# Altium PCB project_10.PcbDoc
Units mil, origin at the board's own origin, x right, y up, seen from the top; angles counter-clockwise.
Board outline 2470 x 2740 mil, 2 copper layers (Top Layer, Bottom Layer); 16 components, 42 nets, 110 pads, 10 vias.
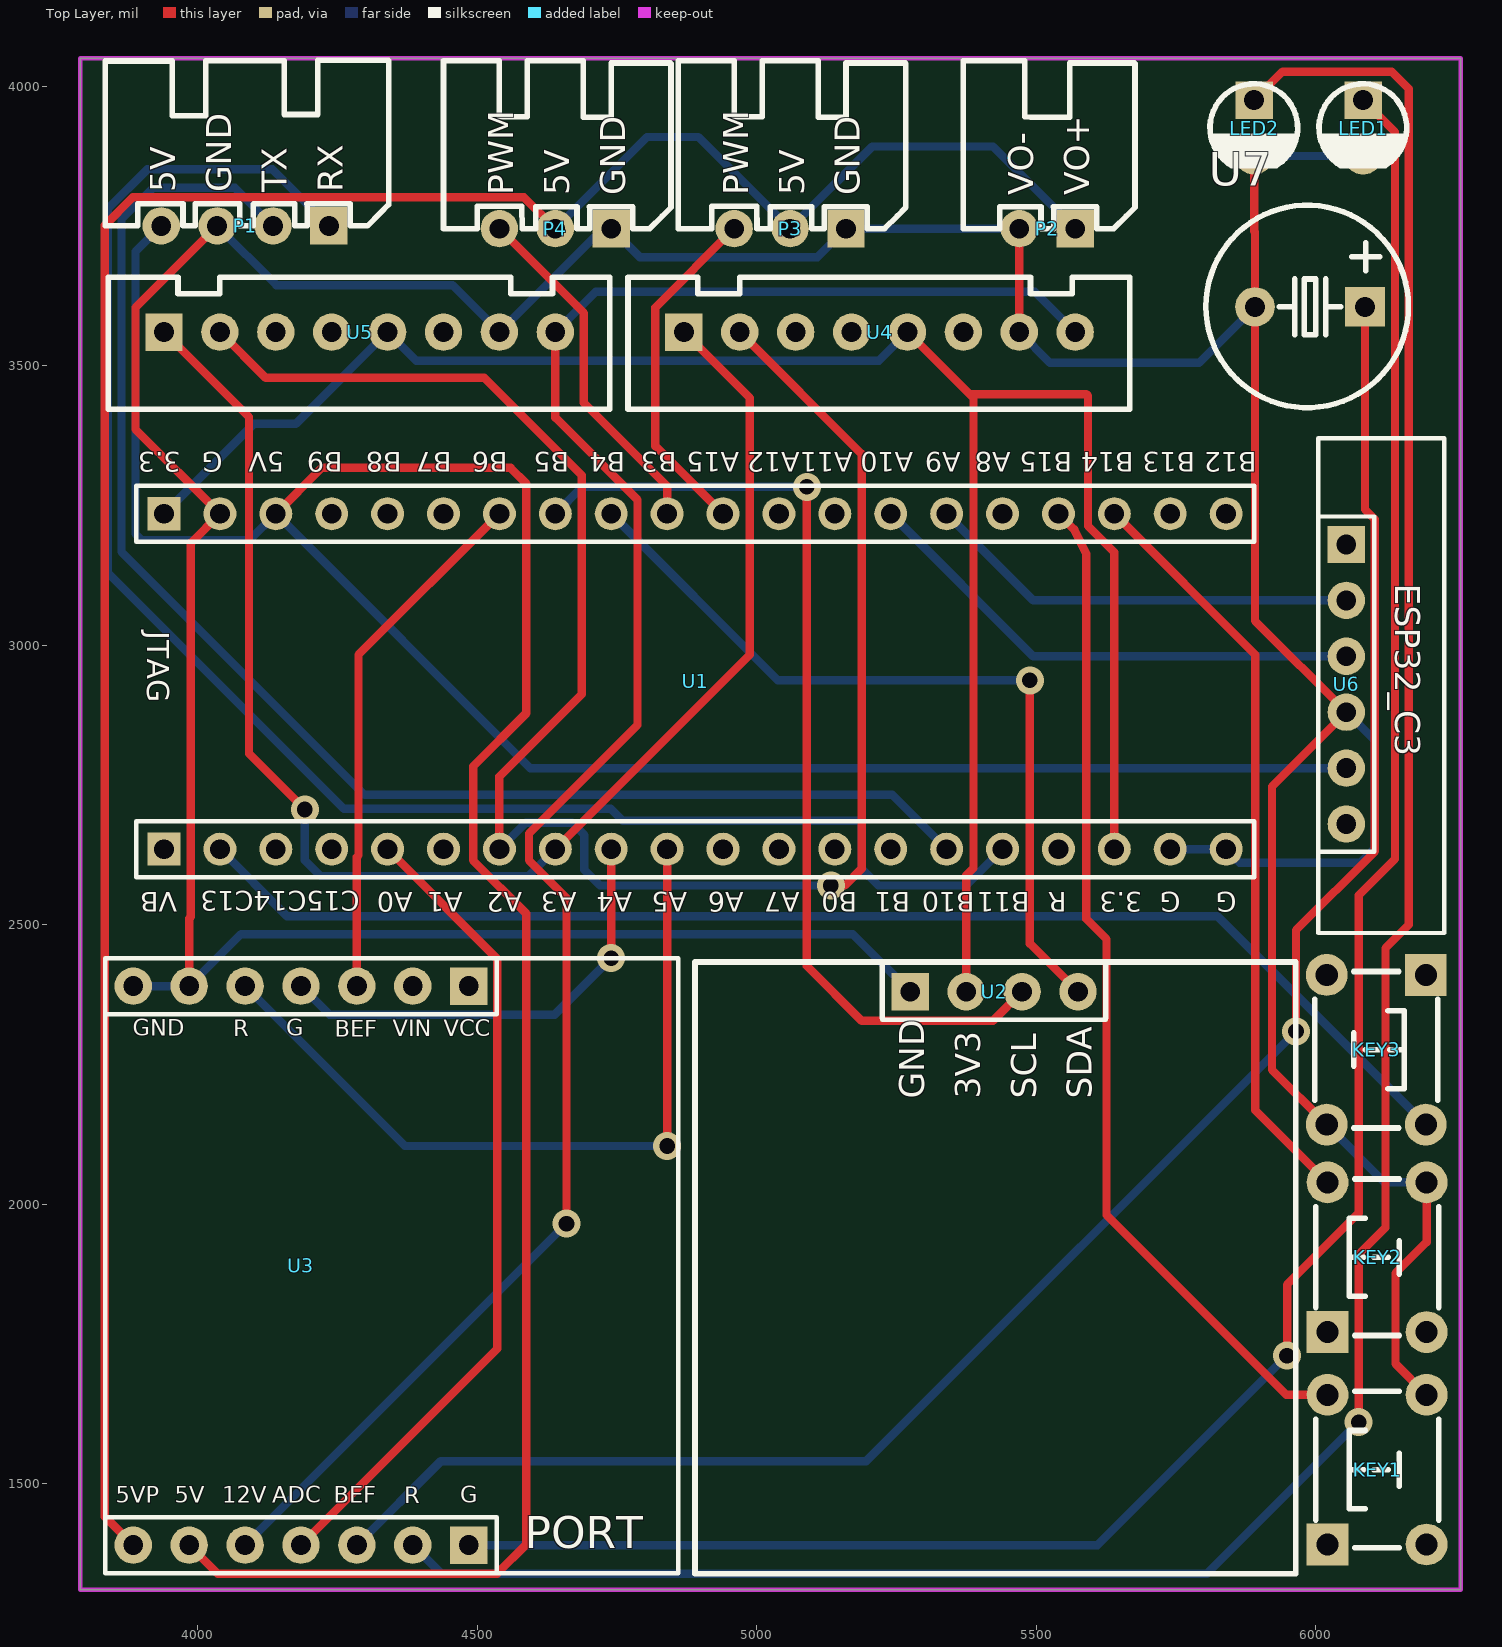
[diagram p0: Top Layer view]
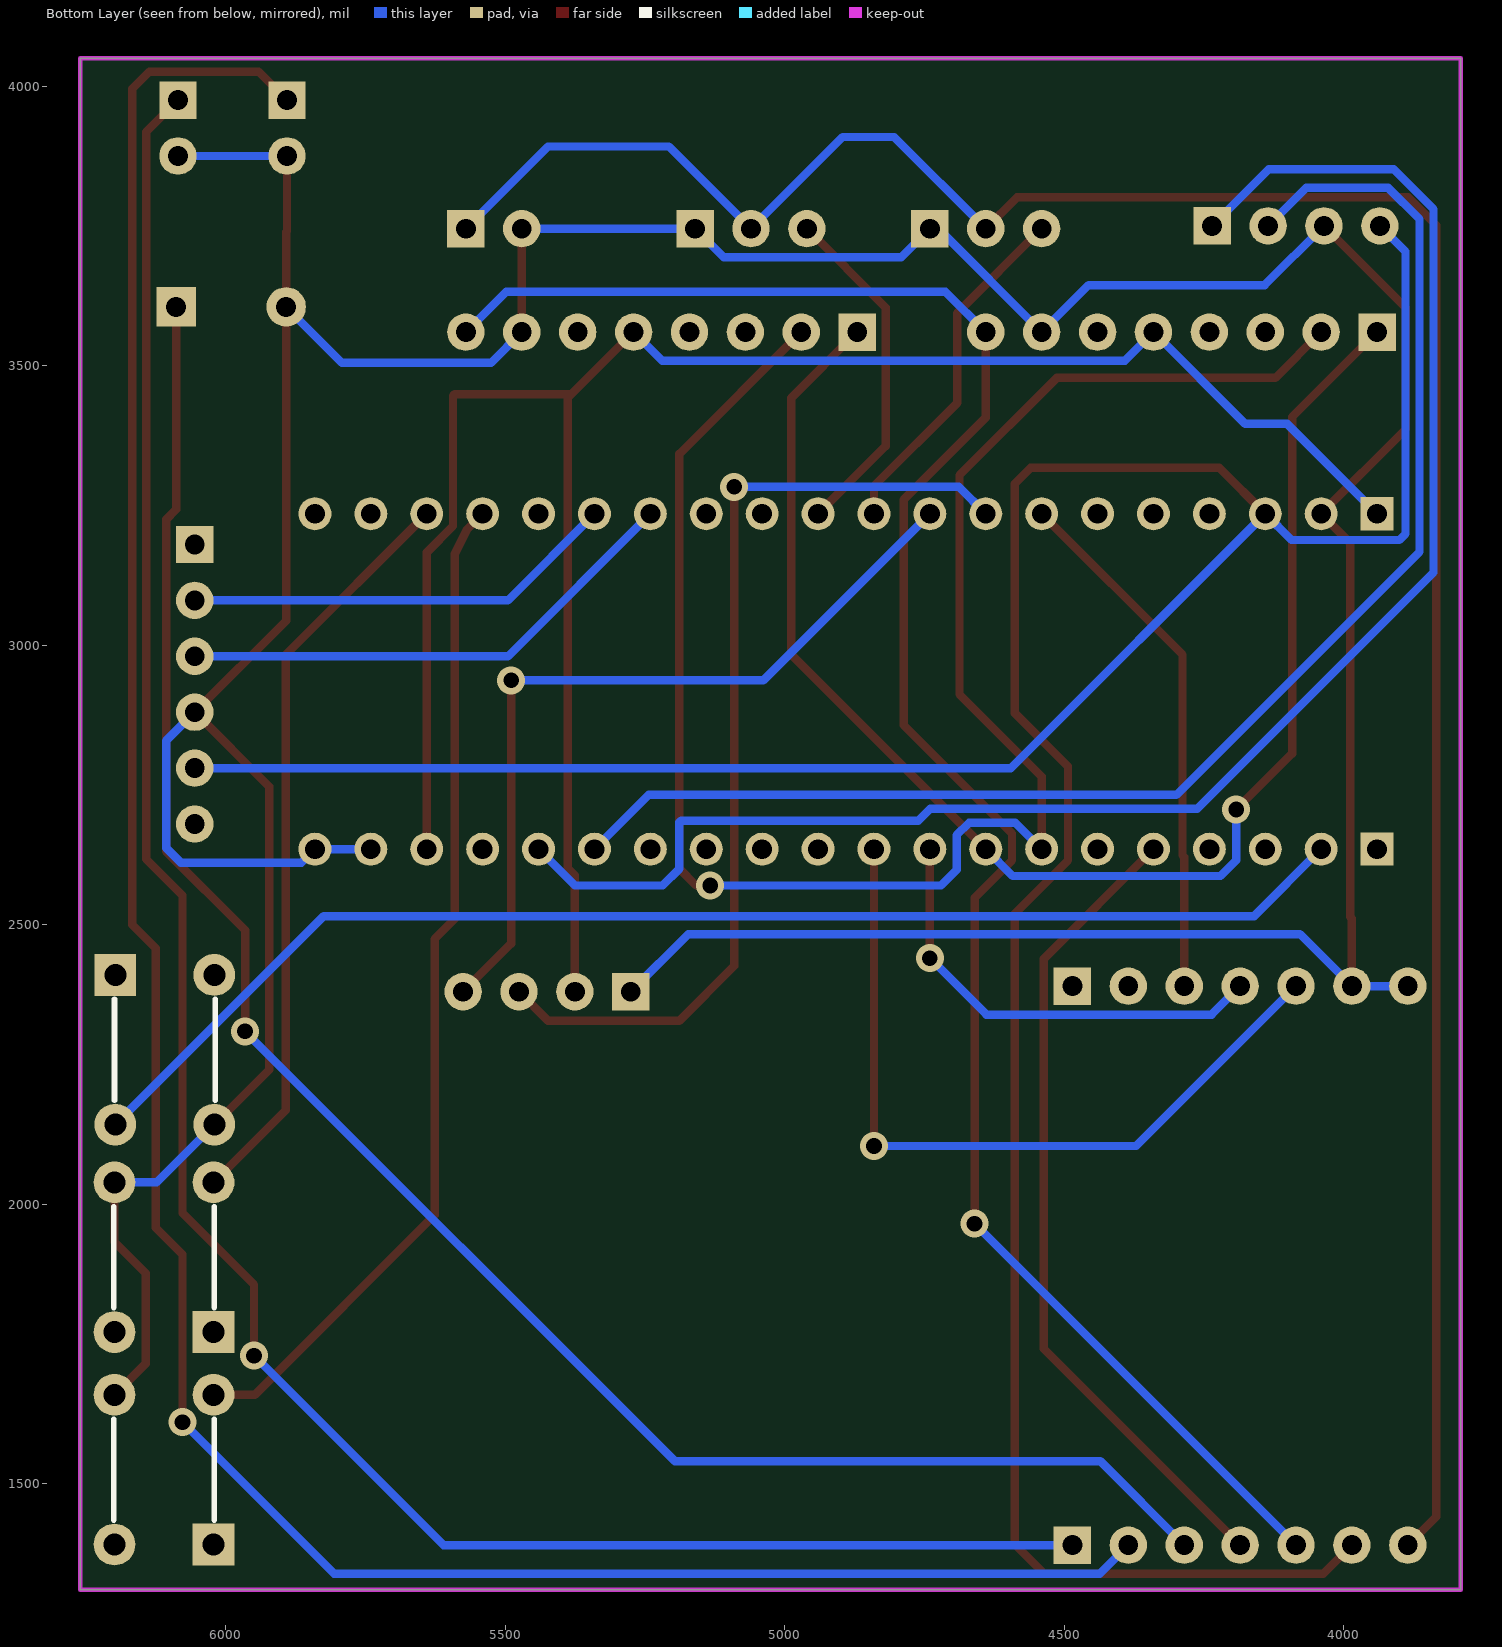
[diagram p1: Bottom Layer view, seen from below]

## Layer stack, top to bottom
Top Solder: solder mask 0.4, Solder Resist, Dk 3.5
Top Layer: signal copper 1.4
Dielectric 1: dielectric 12.6, FR-4, Dk 4.8
Bottom Layer: signal copper 1.4
Bottom Solder: solder mask 0.4, Solder Resist, Dk 3.5

## Board outline
3790,1310 6260,1310 6260,4050 3790,4050

## Design rules (kind name [scope] priority, off if disabled: settings)
Clearance [All] p1: gap=10 ignorepadtopadclearanceinfootprint=FALSE
PolygonConnect [All] p1: connectstyle=Relief reliefconductorwidth=10 reliefentries=4 polygonreliefangle="90 Angle" airgapwidth=10
RoutingVias [All] p1: holewidth=28 width=50 viastyle="Through Hole" minholewidth=28 minwidth=50 maxholewidth=28 maxwidth=50
SolderMaskExpansion [All] p1: expansion=4 istentingtop=FALSE
SupplyNets "Schematic Supply Nets_4" [InNet('12V')] p1: voltage=0.000
SupplyNets "Schematic Supply Nets_3" [InNet('5V_POW')] p2: voltage=0.000
SupplyNets "Schematic Supply Nets_2" [InNet('3V3')] p3: voltage=0.000
SupplyNets "Schematic Supply Nets_1" [InNet('5V')] p4: voltage=0.000
SupplyNets "Schematic Supply Nets" [InNet('GND')] p5: voltage=0.000
Width [All] p1: maxlimit=100 minlimit=10 preferedwidth=15 minimp=50.000000 maximp=50.000000 favimp=50.000000
30 further rules are at their usual default settings.

## Components (designator, comment, footprint, x,y, rotation, side; value= is the part's Value field where it differs from the comment)
KEY1 "mod_buttom" MOD_BUTTOM 6110,1515 r90 top
KEY2 "mod_buttom" MOD_BUTTOM 6110,1895 r90 top
KEY3 "mod_buttom" MOD_BUTTOM 6108.58,2286.14 r270 top
LED1 "红色" "LED 3MM-B" 6085,3925 r270 top
LED2 "红色" "LED 3MM-B" 5890,3925 r270 top
P1 "port_uart_4p" XH2.54_4P 4090,3905 r0 top
P2 "port_mot_2p" XH2.54_2P 5515,3870 r0 top
P3 "port_pwm_3p" XH2.54_3P 5075,3880 r0 top
P4 "port_pwm_3p" XH2.54_3P 4655,3880 r0 top
U1 "f1_hw_2_gw" F1_HW_2_GW 4880,2925 r180 top
U2 "mod_oled" MOD_OLED 5429.91,2378.15 r0 top
U3 "pow_hw_3_V02.00" POW_HW_3_2 4305,1925 r0 top
U4 "mod_ZDTMotor" XH2.54-LI-8P 5220,3560 r0 top
U5 "mod_ZDTMotor" XH2.54-LI-8P 4290,3560 r0 top
U6 "c3_hw_1" C3_HW_1 6055,2930 r270 top
U7 "mod_buzzer" MOD_BUZZER 5985,3610 r0 top

## Footprints (in the part's own frame and the unit in brackets; to place one, negate y for a bottom-side part, rotate by r counter-clockwise, add the part's x,y. Pads: shape width x height; smd on the part's side, far side on the other; paste and mask are expansions set on the pad)
C3_HW_1 [mm]
  rect 1.7x1.7 hole 0.9: 1(-6.35,0)
  round 1.7 hole 0.9: 2(-3.81,0) 3(-1.27,0) 4(1.27,0) 5(3.81,0) 6(6.35,0)
  silkscreen extent -11.18,-1.27 11.3,4.45, body extent -11.18,-1.27 11.3,4.45, height 8.5
F1_HW_2_GW [mm]
  rect 1.5x1.5 hole 0.9: 1(23.876,7.366) 21(23.876,-7.874)
  round 1.5 hole 0.9: 2(21.336,7.366) 3(18.796,7.366) 4(16.256,7.366) 5(13.716,7.366) 6(11.176,7.366) 7(8.636,7.366) 8(6.096,7.366) 9(3.556,7.366) 10(1.016,7.366) 11(-1.524,7.366) 12(-4.064,7.366) 13(-6.604,7.366) 14(-9.144,7.366) 15(-11.684,7.366) 16(-14.224,7.366) 17(-16.764,7.366) 18(-19.304,7.366) 19(-21.844,7.366) 20(-24.384,7.366) 22(21.336,-7.874) 23(18.796,-7.874) 24(16.256,-7.874) 25(13.716,-7.874) 26(11.176,-7.874) 27(8.636,-7.874) 28(6.096,-7.874) 29(3.556,-7.874) 30(1.016,-7.874) 31(-1.524,-7.874) 32(-4.064,-7.874) 33(-6.604,-7.874) 34(-9.144,-7.874) 35(-11.684,-7.874) 36(-14.224,-7.874) 37(-16.764,-7.874) 38(-19.304,-7.874) 39(-21.844,-7.874) 40(-24.384,-7.874)
  silkscreen extent -25.65,-9.14 25.15,8.64, body extent -26.92,-11.56 26.42,11.18, height 0.25
"LED 3MM-B" [mm] "蓝色3mm直插LED"
  rect 1.7x1.7 hole 0.9: 1(-1.27,0)
  round 1.7 hole 0.9: 2(1.27,0)
  silkscreen extent -2.01,-2 1.72,1.98, body extent -1.95,-1.95 1.64,1.95, height 5.55
MOD_BUTTOM [mm]
  rect 1.9x1.9 hole 1: 1(-3.146,2.25)
  round 1.9 hole 1: 2(-3.146,-2.25) 3(3.654,-2.25) 4(3.654,2.25)
  silkscreen extent -3.3,-2.79 3.81,2.79, body extent -3.85,-3 4.36,3, height 4.25
MOD_BUZZER [mm] "有源蜂鸣器"
  rect 1.8x1.8 hole 0.9: 1(2.627,-0.127)
  round 1.8 hole 0.9: 2(-2.373,-0.127)
  silkscreen extent -4.6,-4.7 4.6,4.49, body extent -4.37,-4.63 4.63,4.37, height 5.45
MOD_OLED [mm] "外购屏幕模块接口"
  rect 1.7x1.7 hole 0.9: 1(-3.935,0.047)
  round 1.7 hole 0.9: 2(-1.395,0.047) 3(1.145,0.047) 4(3.685,0.047)
  silkscreen extent -13.72,-26.4 13.58,1.4, body extent -13.72,-26.42 13.59,1.4, height 8.5
POW_HW_3_2 [mm]
  rect 1.7x1.7 hole 0.9: 1(4.572,11.811) 7(4.572,-13.589)
  round 1.7 hole 0.9: 2(2.032,11.811) 3(-0.508,11.811) 4(-3.048,11.811) 5(-5.588,11.811) 6(-10.668,11.811) 6(-8.128,11.811) 8(2.032,-13.589) 9(-0.508,-13.589) 10(-3.048,-13.589) 11(-5.588,-13.589) 12(-8.128,-13.589) 13(-10.668,-13.589)
  silkscreen extent -11.94,-14.86 14.1,13.08, body extent -11.94,-14.86 14.1,13.08, height 8.5
XH2.54-LI-8P [mm] "接插件，8P"
  rect 1.7x1.7 hole 0.9: 1(-8.89,0)
  round 1.7 hole 0.9: 2(-6.35,0) 3(-3.81,0) 4(-1.27,0) 5(1.27,0) 6(3.81,0) 7(6.35,0) 8(8.89,0)
  silkscreen extent -11.43,-3.5 11.36,2.5, body extent -11.39,-3.3 11.39,2.4, height 7.05
XH2.54_2P [mm]
  rect 1.7x1.7 hole 0.9: 1(1.397,-3.175)
  round 1.7 hole 0.9: 2(-1.143,-3.175)
  silkscreen extent -3.68,-3.17 4.11,4.44, body extent -3.64,-3.52 3.9,4.17, height 5.73
XH2.54_3P [mm]
  rect 1.7x1.7 hole 0.9: 1(2.159,-3.429)
  round 1.7 hole 0.9: 2(-0.381,-3.429) 3(-2.921,-3.429)
  silkscreen extent -5.46,-3.43 4.88,4.19, body extent -5.42,-3.78 4.66,3.92, height 5.73
XH2.54_4P [mm]
  rect 1.7x1.7 hole 0.9: 1(3.683,-3.937)
  round 1.7 hole 0.9: 2(1.143,-3.937) 3(-1.397,-3.937) 4(-3.937,-3.937)
  silkscreen extent -6.48,-3.94 6.4,3.59, body extent -6.44,-4.29 6.18,3.41, height 5.73

## Part data
KEY1 KEY2 KEY3: "6*6*4.3按键"
LED1 LED2: library part mod_LED, "插件LED", BOM名称=插件LED, 学习资源=www.ooocke.com, 版权归属=源创客
P1: "串口接口/SPP蓝牙模块 / XH2.54弯排针4p/4p排母"
P2: "开环直流电机接口 / XH2.54弯排针2p"
P3 P4: "舵机接口 / XH2.54弯排针3p"
U2: "oled模块 / 4p排母"
U3: "两路降压电源模块一路通用电源模块"
U4 U5: "闭环步进,10-29V"
U6: "ESP32C3蓝牙模块 / 6p排母"
U7: "有源蜂鸣器"

## Via types
v1: diameter 50, hole 28, Top Layer to Bottom Layer, 10 vias

## Nets (pads, with @x,y where several pads share a name; then routed paths per layer and width w, separated by ;. In a path a pad name is that pad's centre, name@x,y a point inside that pad or via, vN(x,y) a via of type N, cw(c..) or ccw(c..) an arc to the next point about the centre after c; other vN are vias at no path point)
3V3: U1.18 U1.21 U2.2 U4.5 U5.5 | length 3784.8
  Top Layer w15: U4.5 5381,3449 ; U2.2 5375,2588 5388,2601 5388,3442 5381,3449 ; U1.18 5640,3166 5592.97,3213.03 5592.97,3446.03 5590,3449 5381,3449
  Bottom Layer w15: U1.21 4101,3396 4176,3396 U5.5 4391,3509 5219,3509 U4.5
5V: P1.4 U1.23 U3.12 U6.5 | length 6064.5
  Top Layer w15: U3.12 4036,1339 4536,1339 4588,1391 4588,2519.97 4492.97,2615 4492.97,2783.1 4588,2878.13 4588,3289 4560,3317 4222,3317 U1.23
  Bottom Layer w15: P1.4 3889.03,3704.03 3889.03,3198.94 3900,3187.97 4092.97,3187.97 U1.23 4595,2780 U6.5
5V_POW: P2.1 P3.2 P4.2 U3.13 | length 4419.7
  Top Layer w15: U3.13 3834,1441 3834,3751 3884,3801 4584,3801 P4.2
  Bottom Layer w15: P4.2 4804,3909 4896,3909 P3.2 5207,3892 5423,3892 P2.1
12V: U3.11 U4.8 U5.8 | length 3566.9
  Top Layer w15: U5.8 4640,3407.03 4787.03,3260 4787.03,2857.03 4592.97,2662.97 4592.97,2615.03 4660,2548 v1(4660,1965)
  Bottom Layer w15: U3.11 v1(4660,1965) ; U5.8 4712,3632 5498,3632 U4.8
GND: KEY1.3 KEY2.3 KEY3.3 LED1.2 LED2.2 P1.3 P2.2 P3.1 P4.1 U1.19 U1.20 U1.22 U2.1 U3.6 U4.7 U5.7 U6.4 U7.2 | length 8670.4
  Top Layer w15: U3.6@3985,2390 3985,2511 3988,2514 3988,3183 U1.22 3889,3386 3889,3604 P1.3 ; U4.7 5470,3652 P2.2 ; LED2.2 5890,3740.57 5891.57,3739 U7.2 5891.57,3043.43 U6.4 5922,2747 5922,2240.28 KEY3.3 ; KEY1.3 6143,1714.44 6143,1876.42 6198.58,1932 KEY2.3
  Bottom Layer w15: U3.6@3885,2390 3985,2390 4078,2483 5172,2483 U2.1 ; P1.3 4141,3644 4456,3644 U5.7 4725,3745 P4.1 4791,3694 5109,3694 P3.1 P2.2 ; U4.7 5525,3505 5791.57,3505 U7.2 ; U1.19 U1.20 5864,2611 6080,2611 6106,2637 6106,2829 U6.4 ; LED2.2 LED1.2 ; KEY3.3 6123.43,2038.86 KEY2.3
NetLED1_1: LED1.1 U3.7 | length 3954
  Top Layer w15: v1(5949,1729) 5949,1856 6077,1984 6077,2552.33 6142,2617.33 6142,3918 LED1.1
  Bottom Layer w15: U3.7 5610,1390 v1(5949,1729)
NetLED2_1: LED2.1 U3.8 | length 4558.6
  Top Layer w15: LED2.1 5941,4026 6136,4026 6167,3995 6167,2500 6125,2458 6125,1958 6077,1910 v1(6077,1610)
  Bottom Layer w15: U3.8 4436,1339 5806,1339 v1(6077,1610)
NetU3_9: U3.9 U7.1 | length 3422.3
  Top Layer w15: v1(5965,2309) 5965,2490 6106,2631 6106,3225 6088.43,3242.57 U7.1
  Bottom Layer w15: U3.9 4435,1540 5196,1540 v1(5965,2309)
NRST: U1.17
PA0: U1.5 U3.10 | length 1471.6
  Top Layer w15: U3.10 4536,1741 4536,2439 U1.5
PA1: U1.6
PA2: U1.7 U4.2 U5.2 | length 3295.9
  Top Layer w15: U5.2 4122,3478 4513,3478 4687.03,3303.97 4687.03,2912.03 4540,2765 U1.7 ; U4.2 5188,3342 5188,2600 5158,2570 v1(5133,2570)
  Bottom Layer w15: U1.7 4587.03,2682.03 4669.97,2682.03 4692,2660 4692,2598 4720,2570 v1(5133,2570)
PA3: U1.8 U4.1 U5.1 | length 2646.9
  Top Layer w15: U5.1 4092,3408 4092,2806 v1(4192,2706) ; U1.8 4988,2983 4988,3442 U4.1
  Bottom Layer w15: v1(4192,2706) 4192,2615 4220,2587 4592,2587 U1.8
PA4: U1.9 U3.4 | length 813
  Top Layer w15: v1(4740,2440) U1.9
  Bottom Layer w15: U3.4 4236,2339 4639,2339 v1(4740,2440)
PA5: U1.10 U3.5 | length 1404.5
  Top Layer w15: v1(4840,2104) U1.10
  Bottom Layer w15: U3.5 4371,2104 v1(4840,2104)
PA6: U1.11
PA7: U1.12
PA8: U1.36
PA9: U1.35 U6.2 | length 779.2
  Bottom Layer w15: U1.35 5495,3080 U6.2
PA10: U1.34 U6.3 | length 920.6
  Bottom Layer w15: U1.34 5495,2980 U6.3
PA11: U1.33
PA12: U1.32
PA15: P3.3 U1.31 | length 618.5
  Top Layer w15: U1.31 4819,3356 4819,3604 P3.3
PB0: U1.13
PB1: U1.14
PB3: P4.3 U1.30 | length 634.3
  Top Layer w15: P4.3 4691,3594 4691,3433.29 4840,3284.29 U1.30
PB4: U1.29 U2.4 | length 1465.1
  Top Layer w15: v1(5489,2937) 5489,2466 U2.4
  Bottom Layer w15: U1.29 5038,2937 v1(5489,2937)
PB5: U1.28 U2.3 | length 1774
  Top Layer w15: v1(5090,3283) 5090,2426 5188,2328 5423,2328 U2.3
  Bottom Layer w15: U1.28 4688,3283 v1(5090,3283)
PB6: U1.27 U3.3 | length 950.6
  Top Layer w15: U3.3 4285,2621 4288,2624 4288,2983 U1.27
PB7: U1.26
PB8: U1.25
PB9: U1.24
PB10: P1.2 U1.15 | length 2613.7
  Bottom Layer w15: P1.2 4067,3818 3920,3818 3864.03,3762.03 3864.03,3166.91 4298.92,2732.03 5242.97,2732.03 U1.15
PB11: P1.1 U1.16 | length 3025.7
  Bottom Layer w15: P1.1 4134,3851 3910,3851 3839.03,3780.03 3839.03,3129.97 4261.97,2707.03 4739.5,2707.03 4760.52,2686 5185,2686 5188,2683 5188,2600 5218,2570 5375,2570 U1.16
PB12: U1.40
PB13: U1.39
PB14: KEY2.4 U1.38 | length 1354.1
  Top Layer w15: U1.38 5892,2983 5892,2168.28 KEY2.4
PB15: KEY1.4 U1.37 | length 1814.8
  Top Layer w15: U1.37 5567.97,3207.03 5590,3162.97 5590,2510 5626,2474 5626,1980.5 5947.64,1658.86 KEY1.4
PC13: KEY3.4 U1.2 | length 2361.3
  Bottom Layer w15: U1.2 4160,2515 5824.45,2515 KEY3.4
PC14: U1.3
PC15: U1.4
VBAT: U1.1
pads on no net: KEY1.1 KEY1.2 KEY2.1 KEY2.2 KEY3.1 KEY3.2 U3.1 U3.2 U4.3 U4.4 U4.6 U5.3 U5.4 U5.6 U6.1 U6.6

## Keep-outs
Keep-Out Layer:
  the board outline again, w7.87

## Text inside footprints (layer, text, board x,y; h text height)
P1: Top Overlay "RX" at 4260,3810 h45 r90; Top Overlay "TX" at 4160,3810 h45 r90; Top Overlay "GND" at 4060,3810 h45 r90; Top Overlay "5V" at 3960,3810 h45 r90
P2: Top Overlay "VO+" at 5595,3805 h45 r90; Top Overlay "VO-" at 5495,3805 h45 r90
P3: Top Overlay "GND" at 5185,3805 h45 r90; Top Overlay "5V" at 5085,3805 h45 r90; Top Overlay "PWM" at 4985,3805 h45 r90
P4: Top Overlay "GND" at 4765,3805 h45 r90; Top Overlay "5V" at 4665,3805 h45 r90; Top Overlay "PWM" at 4565,3805 h45 r90
U1: Top Overlay "JTAG" at 3910,3025 h39.37 r270; Top Overlay "R" at 5555,2558 h35.43 r180; Top Overlay "B11" at 5489,2558 h35.43 r180; Top Overlay "B10" at 5390,2558 h35.43 r180; Top Overlay "B1" at 5275,2558 h35.43 r180; Top Overlay "B0" at 5180,2558 h35.43 r180; Top Overlay "A0" at 4385,2558 h35.43 r180; Top Overlay "A1" at 4474,2558 h35.43 r180; Top Overlay "A2" at 4580.71,2558 h35.43 r180; Top Overlay "A3" at 4678.57,2558 h35.43 r180; Top Overlay "A4" at 4778,2558 h35.43 r180; Top Overlay "A5" at 4876,2558 h35.43 r180; Top Overlay "A6" at 4977,2558 h35.43 r180; Top Overlay "A7" at 5077,2558 h35.43 r180; Top Overlay "VB" at 3964,2558 h35.43 r180; Top Overlay "3.3" at 5690,2558 h35.43 r180; Top Overlay "G" at 5759,2558 h35.43 r180; Top Overlay "G" at 5859,2558 h35.43 r180; Top Overlay "B12" at 5895,3345 h35.43 r180; Top Overlay "B13" at 5785,3345 h35.43 r180; Top Overlay "B14" at 5675,3345 h35.43 r180; Top Overlay "B15" at 5565,3345 h35.43 r180; Top Overlay "A8" at 5455,3345 h35.43 r180; Top Overlay "A9" at 5365,3345 h35.43 r180; Top Overlay "A10" at 5280,3345 h35.43 r180; Top Overlay "A11" at 5172,3345 h35.43 r180; Top Overlay "A12" at 5077,3345 h35.43 r180; Top Overlay "A15" at 4969,3345 h35.43 r180; Top Overlay "B3" at 4857,3345 h35.43 r180; Top Overlay "B4" at 4765,3345 h35.43 r180; Top Overlay "B5" at 4665,3345 h35.43 r180; Top Overlay "B6" at 4555,3345 h35.43 r180; Top Overlay "B7" at 4455,3345 h35.43 r180; Top Overlay "B8" at 4365,3345 h35.43 r180; Top Overlay "B9" at 4260,3345 h35.43 r180; Top Overlay "5V" at 4155,3345 h35.43 r180; Top Overlay "G" at 4045,3345 h35.43 r180; Top Overlay "3.3" at 3970,3345 h35.43 r180; Top Overlay "C15C14C13" at 4290,2560 h35.43 r180
U2: Top Overlay "GND" at 5299.91,2188.15 h45 r90; Top Overlay "SDA" at 5599.91,2188.15 h45 r90; Top Overlay "SCL" at 5499.91,2188.15 h45 r90; Top Overlay "3V3" at 5399.91,2188.15 h45 r90
U3: Top Overlay "GND" at 3884.04,2291.19 h50; Top Overlay "G" at 4159.04,2291.19 h50; Top Overlay "R" at 4064.04,2290.66 h50; Top Overlay "BEF" at 4245,2290 h50; Top Overlay "VIN" at 4349.07,2290.66 h50; Top Overlay "VCC" at 4440.03,2290.52 h50; Top Overlay "12V" at 4044.04,1455.66 h50; Top Overlay "5VP" at 3854.04,1456.19 h50; Top Overlay "5V" at 3959.04,1456.19 h50; Top Overlay "G" at 4470,1455.52 h50; Top Overlay "ADC" at 4134.04,1456.19 h50; Top Overlay "R" at 4370,1455 h50; Top Overlay "BEF" at 4244.04,1455.67 h50; Top Overlay "PORT" at 4585,1366.02 h98.43
U6: Top Overlay "ESP32_C3" at 6142.5,3110 h45 r270